# Altium PCB ESPModulv2.PcbDoc
Units mil, origin at the board's own origin, x right, y up, seen from the top; angles counter-clockwise.
Board outline 2955.91 x 2952.76 mil, 2 copper layers (Top Layer, Bottom Layer); 61 components, 47 nets, 242 pads, 84 vias.
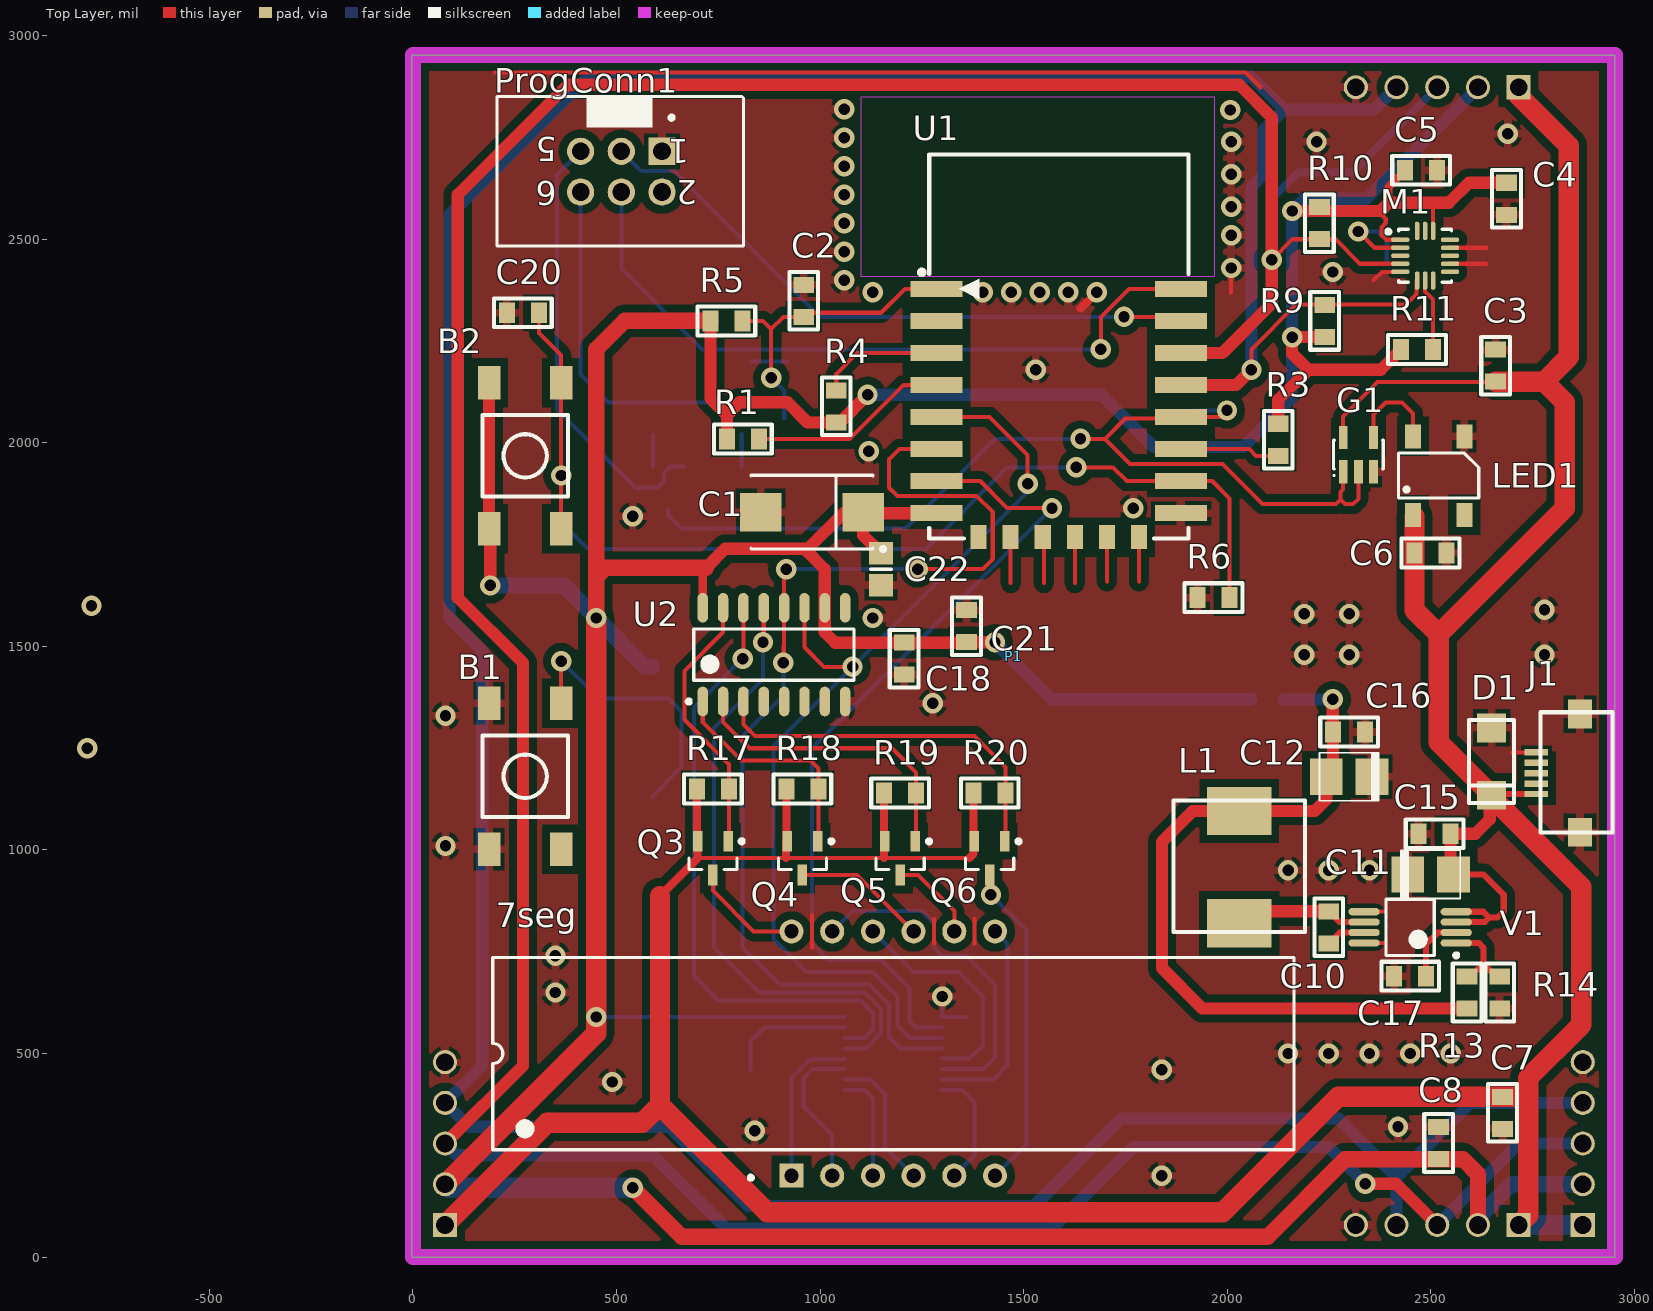
[diagram p0: Top Layer view]
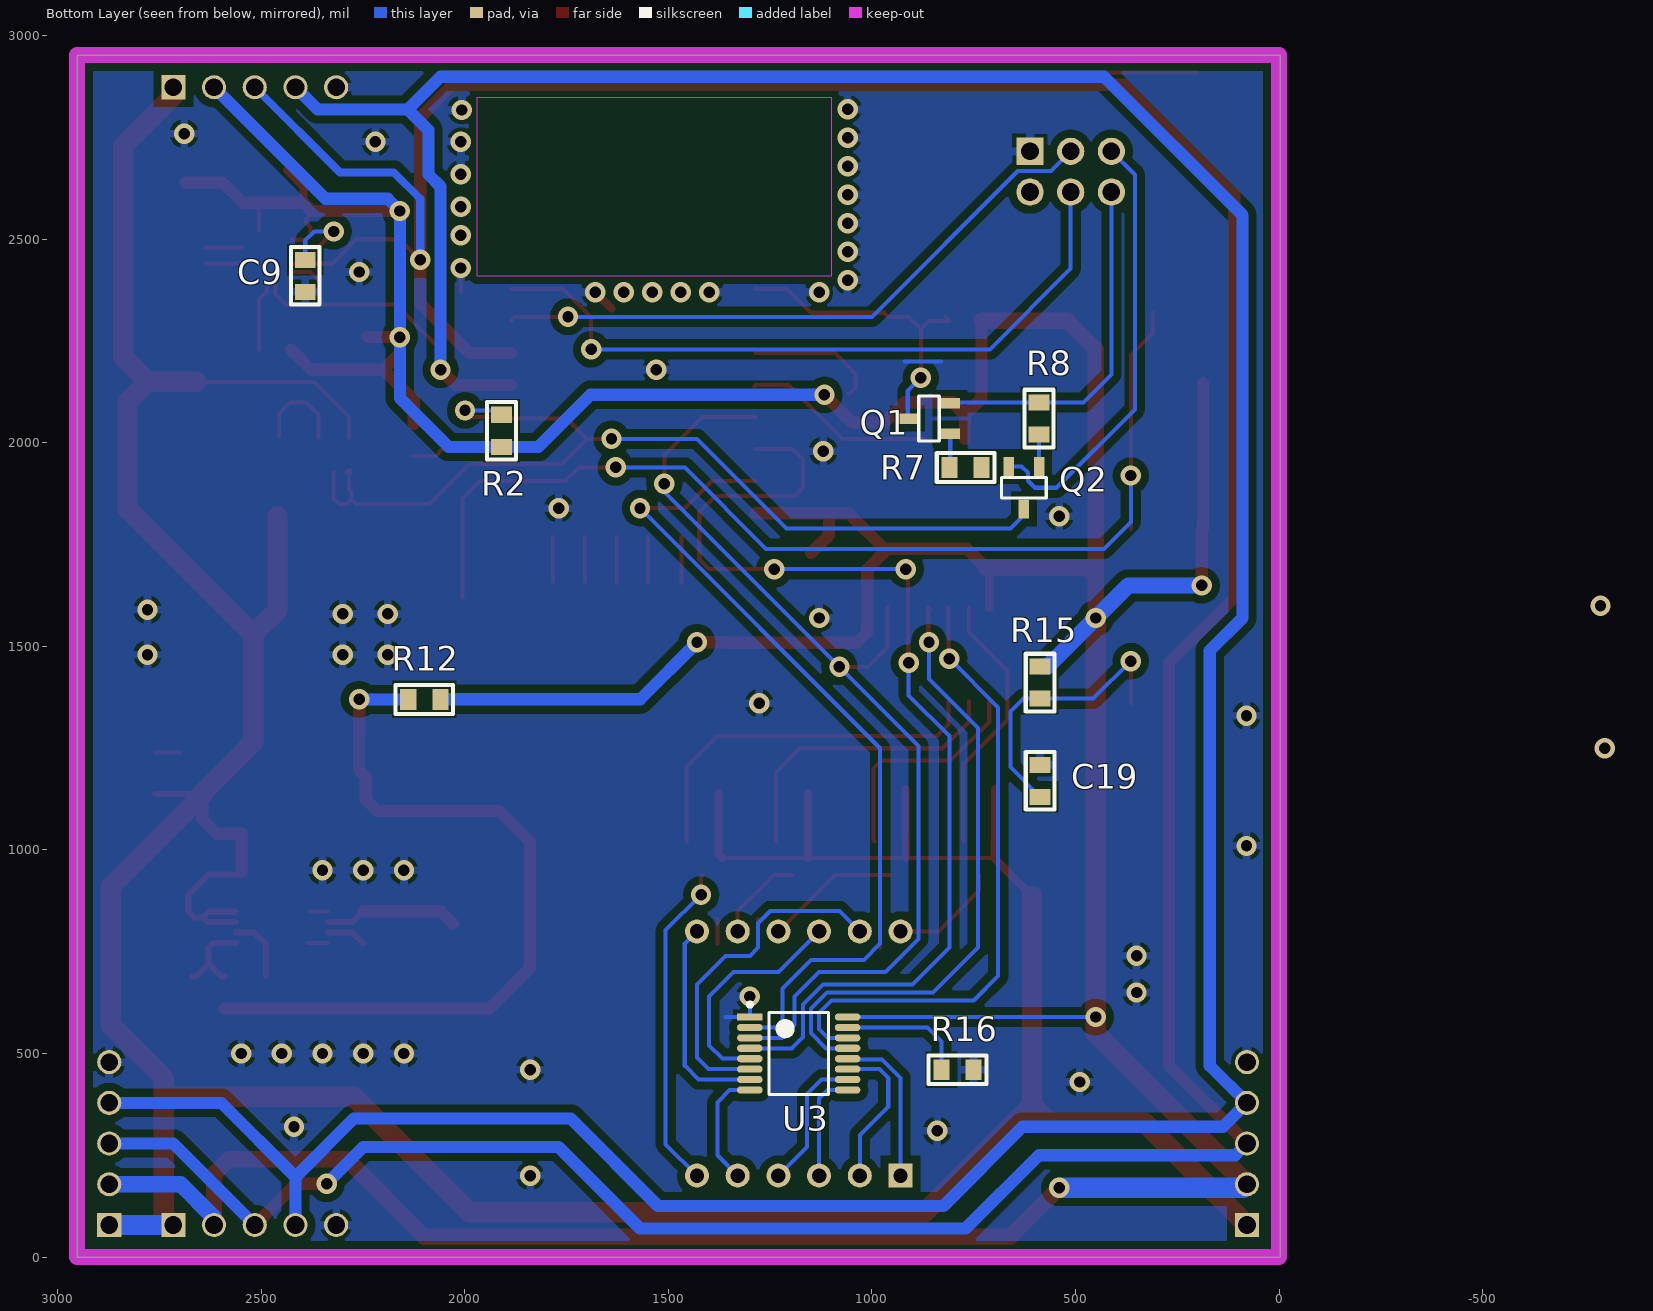
[diagram p1: Bottom Layer view, seen from below]

## Layer stack, top to bottom
Top Solder: solder mask 0.4, Solder Resist, Dk 3.5
Top Layer: signal copper 1.4
Dielectric 1: dielectric 12.6, FR-4, Dk 4.8
Bottom Layer: signal copper 1.4
Bottom Solder: solder mask 0.4, Solder Resist, Dk 3.5

## Board outline
-3.15,0 2952.76,0 2952.76,2952.76 -3.15,2952.76

## Design rules (kind name [scope] priority, off if disabled: settings)
Clearance Clearance_1 [InPoly vs not InNet('GND')] p1: gap=20
Clearance [All] p2: gap=10
PolygonConnect PolygonConnect_5 [All vs IsNamedPolygon('GND_L02_P002')] p1: connectstyle=Relief reliefconductorwidth=20 reliefentries=4 polygonreliefangle="90 Angle" airgapwidth=10
PolygonConnect PolygonConnect_4 [All vs IsNamedPolygon('GND_L01_P000')] p2: connectstyle=Relief reliefconductorwidth=20 reliefentries=4 polygonreliefangle="90 Angle" airgapwidth=10
PolygonConnect PolygonConnect_3 [All vs IsNamedPolygon('GND_L01_P000')] p3: connectstyle=Relief reliefconductorwidth=10 reliefentries=4 polygonreliefangle="45 Angle" airgapwidth=10
PolygonConnect PolygonConnect_2 [All vs IsNamedPolygon('GND_L01_P000')] p4: connectstyle=Relief reliefconductorwidth=10 reliefentries=4 polygonreliefangle="45 Angle" airgapwidth=10
PolygonConnect PolygonConnect_1 [All vs IsNamedPolygon('GND_L02_P002')] p5: connectstyle=Relief reliefconductorwidth=10 reliefentries=4 polygonreliefangle="45 Angle" airgapwidth=10
PolygonConnect [All] p6: connectstyle=Relief reliefconductorwidth=20 reliefentries=4 polygonreliefangle="90 Angle" airgapwidth=10
RoutingVias [All] p1: holewidth=28 width=50 viastyle="Through Hole" minholewidth=28 minwidth=50 maxholewidth=28 maxwidth=50
SolderMaskExpansion [All] p1: expansion=4
UnpouredPolygon [All] p1: allowunpoured=FALSE
Width [All] p1: maxlimit=50 minlimit=10 preferedwidth=10
29 further rules are at their usual default settings.

## Classes and differential pairs
component class Modul: C3 C4 C5 C6 C7 C8 C9 C10 C11 C12 C15 C16 C17 D1 G1 J1 L1 LED1 M1 ProgConn1 Q1 Q2 R7 R8 R9 R10 R11 R12 R13 R14 SideboardConn1 Sideboardconn2 V1
component class Display: 7seg *4 B1 B2 C18 C19 C20 C21 Q3 Q4 Q5 Q6 R15 R16 R17 R18 R19 R20 U2 U3
component class 02_ESP12_CORE: C1 C2 C22 R1 R2 R3 R4 R5 R6 U1

## Components (designator, comment, footprint, x,y, rotation, side; value= is the part's Value field where it differs from the comment)
7seg "4 digit, 12 pin" 7SEG-12pin 1180,500 r90 top (schematic designator 7Seg)
B1 "Button" FP_BTN_SMD 275.59,1181.1 r0 top
B2 "Button" FP_BTN_SMD 275.59,1968.5 r0 top
C1 "100uF TAJB107M006RNJ" FP_Tantal_D 980,1830 r180 top
C2 "100nF" FP_0805_CAP_085 960,2349.37 r270 top
C3 "100nF" FP_0805_CAP_085 2660,2190 r270 top
C4 "4.7uF" FP_0805_CAP_085 2686.85,2600 r90 top
C5 "100nF" FP_0805_CAP_085 2476.85,2670 r180 top
C6 "100nF" FP_0805_CAP_085 2500,1730 r180 top
C7 "10uF" FP_0805_CAP_085 2677.17,354.33 r90 top
C8 "10uF" FP_0805_CAP_085 2520,280 r270 top
C9 "100nF" FP_0805_CAP_085 2392.52,2410.63 r90 bottom
C10 "100nF" FP_0805_CAP_085 2250,810 r270 top
C11 "10uF" FP_3528 2500,940 r0 top
C12 "10uF" FP_3528 2300,1180 r180 top
C15 "1uF" FP_0805_CAP_085 2510,1040 r0 top
C16 "1uF" FP_0805_CAP_085 2300,1290 r180 top
C17 "1uF" FP_0805_CAP_085 2450,690 r0 top
C18 "100nF" FP_0805_CAP_085 1206.85,1470 r90 top
C19 "100nF" FP_0805_CAP_085 586.85,1170 r270 bottom
C20 "100nF" FP_0805_CAP_085 270,2320 r0 top
C21 "100nF" FP_0805_CAP_085 1360,1550 r270 top
C22 "1uF" 6-0805_M 1150,1690 r90 top
D1 "ZENER" FP_SMA 2650,1300 r270 top
G1 "SingleGate" SOT23-5 2322.83,1971.46 r0 top
J1 "USB Micro Type B" usb_micro 2760,1240 r270 top
L1 "15uH" FP_IND_MURATA3131 2030,820 r0 top
LED1 "WS2812B" PLCC4-LED 2520,1920 r90 top
M1 "MMA8452" QFN50P300X300X100-16N 2486.85,2460 r0 top
P1 "Connector" Csatlakozok 0,0 r0 top
ProgConn1 "Connector" HEADER6b 611.81,2716.54 r180 top
Q1 "BC817" FP_SOT23-3 860,2060 r180 bottom
Q2 "BC817" FP_SOT23-3 626.85,1890 r90 bottom
Q3 "BSS84" SOT23_N 736.85,980 r270 top
Q4 "BSS84" SOT23_N 956.85,980 r270 top
Q5 "BSS84" SOT23_N 1196.85,980 r270 top
Q6 "BSS84" SOT23_N 1416.85,980 r270 top
R1 "12K" FP_0805_RES 810.63,2010 r0 top
R2 "12K" FP_0805_RES 1910,2030 r90 bottom
R3 "12K" FP_0805_RES 2125.98,2007.87 r270 top
R4 "12K" FP_0805_RES 1040,2090 r90 top
R5 "12K" FP_0805_RES 770,2300 r0 top
R6 "12K" FP_0805_RES 1966.85,1620 r0 top
R7 "12K" FP_0805_RES 770,1940 r180 bottom
R8 "12K" FP_0805_RES 590,2060 r90 bottom
R9 "4K7" FP_0805_RES 2240,2300 r270 top
R10 "4K7" FP_0805_RES 2226.85,2540 r90 top
R11 "4K7" FP_0805_RES 2466.85,2230 r180 top
R12 "0R" FP_0805_RES 2100,1370 r180 bottom
R13 "31.6K" FP_0805_RES 2590,650 r270 top
R14 "10K" FP_0805_RES 2670,650 r90 top
R15 "100K" FP_0805_RES 586.85,1411.26 r90 bottom
R16 "1K" FP_0805_RES 790,460 r0 bottom
R17 "47K" FP_0805_RES 736.85,1150 r180 top
R18 "47K" FP_0805_RES 956.85,1150 r180 top
R19 "47K" FP_0805_RES 1196.85,1140 r180 top
R20 "47K" FP_0805_RES 1416.85,1140 r180 top
U1 "ESP_12_E" "ESP_12_E _widepad" 1271.69,2378.74 r0 top
U2 "74HCT595D" SOP127P600X175-16M 886.85,1480 r90 top
U3 "STP08DP05TTR" TSOP65P640X120-16M 1180,500 r180 bottom
V1 "MCP16311" MSOP8_TSOP65P640X120-8M 2450,810 r180 top

## Footprints (in the part's own frame and the unit in brackets; to place one, negate y for a bottom-side part, rotate by r counter-clockwise, add the part's x,y. Pads: shape width x height; smd on the part's side, far side on the other; paste and mask are expansions set on the pad)
6-0805_M [mm] "Chip Resistor, Body 2.0x1.2mm, IPC Low Density"
  rect 1.4x1.5 smd: 1(-1,0) 2(1,0)
  silkscreen extent 0,-0.65 0,0.65, body extent -1.07,-0.7 1.07,0.7, height 0.7
7SEG-12pin [mm]
  rect 1.5x1.5 hole 0.9: 1(-7.62,6.35)
  round 1.5 hole 0.9: 2(-7.62,3.81) 3(-7.62,1.27) 4(-7.62,-1.27) 5(-7.62,-3.81) 6(-7.62,-6.35) 7(7.62,-6.35) 8(7.62,-3.81) 9(7.62,-1.27) 10(7.62,1.27) 11(7.62,3.81) 12(7.62,6.35)
  Mechanical 13 keep-out lines w0.1: -9.5,25 -9.5,-25
  silkscreen extent -7.87,-25 6,25
Csatlakozok [mm] "Minden csatlakozó"
  rect 1.5x1.5 hole 1.1: 1(2,2) 1(69,2) 1(69,73) 1(73,2)
  round 1.5 hole 1.1: 2(2,4.54) 2(66.46,2) 2(66.46,73) 2(73,4.54) 3(2,7.08) 3(63.92,2) 3(63.92,73) 3(73,7.08) 4(2,9.62) 4(61.38,2) 4(61.38,73) 4(73,9.62) 5(2,12.16) 5(58.84,2) 5(58.84,73) 5(73,12.16)
  body extent -11.31,-11.7 86.48,86.48, height 5.8
"ESP_12_E _widepad" [mm] "ESP-12 Wi-Fi Module by AI-Thinker"
  rect 3.25x1 smd: 1(0.375,0) 2(0.375,-2) 3(0.375,-4) 4(0.375,-6) 5(0.375,-8) 6(0.375,-10) 7(0.375,-12) 8(0.375,-14) 15(15.625,-14) 16(15.625,-12) 17(15.625,-10) 18(15.625,-8) 19(15.625,-6) 20(15.625,-4) 21(15.625,-2) 22(15.625,0)
  rect 1x1.5 smd: 9(3,-15.5) 10(5,-15.5) 11(7,-15.5) 12(9,-15.5) 13(11,-15.5) 14(13,-15.5)
  silkscreen extent -0.7,-15.57 16.08,8.37, body extent 0,-15.49 16,8.51, height 2.75
FP_0805_CAP_085 [mm] "0805 kapacitás YAGEO 0.85mm magas"
  rect 1x1.3 smd: 1(-1,0) 2(1,0)
  silkscreen extent -1.8,-0.9 1.8,0.9, body extent -1,-0.64 1.03,0.64, height 0.85
FP_0805_RES [mm] "0805 ellenállás"
  rect 1x1.3 smd: 1(-1,0) 2(1,0)
  silkscreen extent -1.8,-0.9 1.8,0.9, body extent -1,-0.62 1,0.63, height 0.62
FP_3528 [mm] "3528 TANTÁL SMD \"B\"-TOK"
  rect 2.05x2.25 smd: N(-1.425,0) P(1.425,0)
  silkscreen extent -1.85,-1.5 1.85,1.5, body extent -2.52,-1.5 2.48,1.5, height 2.11
FP_BTN_SMD [mm] "SMD Push Button 6x6mm"
  rect 1.4x2.1 smd: 1(2.25,4.55) 2(2.25,-4.55) 3(-2.25,4.55) 4(-2.25,-4.55)
  silkscreen extent -2.67,-2.54 2.67,2.54, body extent -3,-5 3,5, height 5.1
FP_IND_MURATA3131 [mm] "Murata Chip Inductor LQH88P Series (3131 Size)"
  rect 4x3 smd: 1(0,0) 2(0,7)
  silkscreen extent -4.1,-0.55 4.1,7.65, body extent -4,-0.55 4,7.65, height 3.8
FP_SMA [mm] "SMA DO-214AC tok"
  rect 1.8x1.8 smd: 1(0,0) 2(4.2,0)
  silkscreen extent -0.5,-1.4 4.7,1.4, body extent -0.5,-1.3 4.7,1.3, height 2.42
FP_SOT23-3 [mm] "SOT23-3 tok"
  rect 1.2x0.65 smd: 1(1.327,-0.95) 2(1.327,0.95) 3(-1.327,0)
  silkscreen extent -0.64,-1.4 0.64,1.4, body extent -1.27,-1.46 1.27,1.46, height 0.97
FP_Tantal_D [mm] "Capacitor, SM Tantalum; Body 7.3 x 4.3 mm (LxW typ)"
  rect 2.6x2.4 smd: 1(-3.2,0) 2(3.2,0)
  silkscreen extent -4.58,-2.3 3.8,2.42
HEADER6b [mm] "Connector; IDC, Straight Press-in Pin, Thru-Hole; 10 Position; Vertical; Pitch 2.54 mm; Body 20.32 x 9.2 x 9.45 mm (LxWxH)"
  rect 1.7x1.7 hole 1.1: 1(0,0)
  round 1.7 hole 1.1: 2(0,2.54) 3(2.54,0) 4(2.54,2.54) 5(5.08,0) 6(5.08,2.54)
  silkscreen extent -5.08,-3.43 10.3,5.9
MSOP8_TSOP65P640X120-8M [mm] "TSOP, 8-Leads, Body 3,25x3,20mm, Pitch 0,65mm, IPC Low Density"
  oval 1.95x0.45 smd: 1(-2.875,0.975) 2(-2.875,0.325) 3(-2.875,-0.325) 4(-2.875,-0.975) 5(2.875,-0.975) 6(2.875,-0.325) 7(2.875,0.325) 8(2.875,0.975)
  silkscreen extent -3,-1.75 1.5,1.87
PLCC4-LED [mm] "For WS2812B"
  rect 1.5x1 smd: 1(-2.45,1.6) 2(-2.45,-1.6) 3(2.45,-1.6) 4(2.45,1.6)
  silkscreen extent -1.4,-2.5 1.4,2.5, body extent -2.5,-2.5 2.5,2.5, height 1.61
QFN50P300X300X100-16N [mm] "QFN, 16-Leads, Body 3,00x3,00mm, Pitch 0,50mm, IPC Medium Density"
  oval 1.15x0.3 smd: 1(-1.55,1) 2(-1.55,0.5) 3(-1.55,0) 4(-1.55,-0.5) 5(-1.55,-1) 9(1.55,-1) 10(1.55,-0.5) 11(1.55,0) 12(1.55,0.5) 13(1.55,1)
  oval 0.3x1.15 smd: 6(-0.5,-1.55) 7(0,-1.55) 8(0.5,-1.55) 14(0.5,1.55) 15(0,1.55) 16(-0.5,1.55)
  silkscreen extent -2.42,-1.65 1.65,1.65, body extent -1.5,-1.5 1.5,1.5, height 1
SOP127P600X175-16M [mm] "SOP, 16-Leads, Body 9,90x3,90mm, Pitch 1,27mm, IPC Low Density"
  oval 1.85x0.65 smd: 1(-2.925,4.445) 2(-2.925,3.175) 3(-2.925,1.905) 4(-2.925,0.635) 5(-2.925,-0.635) 6(-2.925,-1.905) 7(-2.925,-3.175) 8(-2.925,-4.445) 9(2.925,-4.445) 10(2.925,-3.175) 11(2.925,-1.905) 12(2.925,-0.635) 13(2.925,0.635) 14(2.925,1.905) 15(2.925,3.175) 16(2.925,4.445)
  silkscreen extent -3.05,-5 1.6,5.44, body extent -3,-5 3,5, height 1.75
SOT23-5 [mm] "SOT-23/SC-74A; 5 Leads; Body 3 x 3 mm, inc. leads (LxW max)"
  rect 0.55x1.45 smd: 1(-0.95,-1.075) 2(0,-1.075) 3(0.95,-1.075) 4(0.95,1.075) 5(-0.95,1.075)
  silkscreen extent -1.57,-1.35 1.55,0.9
SOT23_N [mm] "SOT23, 3-Leads, Body 2.9x1.3mm, Pitch 0.95mm, Lead Span 2.3mm, IPC Medium Density"
  rect 1.3x0.6 smd: 1(-1.05,0.95) 2(-1.05,-0.95) 3(1.05,0)
  silkscreen extent -1.17,-1.5 0.7,1.93, body extent -0.7,-1.5 0.7,1.5, height 1.1
TSOP65P640X120-16M [mm] "TSOP, 16-Leads, Body 5,00x4,40mm, Pitch 0,65mm, IPC Low Density"
  rect 1.6x0.45 smd: 1(-3.05,2.275)
  oval 1.6x0.45 smd: 2(-3.05,1.625) 3(-3.05,0.975) 4(-3.05,0.325) 5(-3.05,-0.325) 6(-3.05,-0.975) 7(-3.05,-1.625) 8(-3.05,-2.275) 9(3.05,-2.275) 10(3.05,-1.625) 11(3.05,-0.975) 12(3.05,-0.325) 13(3.05,0.325) 14(3.05,0.975) 15(3.05,1.625) 16(3.05,2.275)
  silkscreen extent -3.18,-2.55 1.85,3.17, body extent -2.25,-2.55 2.25,2.55, height 1.2
usb_micro [mm]
  rect 0.4x1.45 smd: 1(2.6,0) 2(1.95,0) 3(1.3,0) 4(0.65,0) 5(0,0)
  rect 1.8x1.5 smd: 6(4.985,2.725) 7(-2.385,2.725)
  silkscreen extent -2.5,0.25 5,4.75

## Part data
7seg: library part 7SEG_4Digit_12pin
B1 B2: "Push button"
C1: library part SMT_C_Tantalum_B, "Capacitor, SM Tantalum; Body 3.5 x 2.8 mm (LxW typ)"
C2 C3 C5 C6 C9 C10 C18 C19 C20 C21: library part "CAP 100nF", "Capacitor"
C4: library part "CAP 47uF", "Capacitor"
C7 C8: library part "CAP 10uF", "Capacitor"
C11 C12: library part CAP_ELECT, "Polarized Capacitor"
C15 C16 C17 C22: library part "CAP 1uF", "Capacitor"
D1: "Zener Diode"
J1: library part USB_Micro_TypeB, "Connector SMD USB Micro Type B middle mount"
L1: library part IND, "Inductor"
LED1: "WorldSemi WS2812B Smart RGB LED"
P1: library part Csatlakozók, "A modul szélsõ csatlakozói (I2C,táp,programozó,UART)"
ProgConn1: library part Connector_6pin, "6pin connector"
Q1 Q2: "NPN Transistor"
Q3 Q4 Q5 Q6: "P-channel Enhancement Mode Vertical D-MOSFET"
R1 R2 R3 R4 R5 R6 R7 R8: library part "RES 12K", "Resistor"
R9 R10 R11: library part "RES 4K7", "Resistor"
R12: library part RES, "Resistor"
R13: library part "RES 27K", "Resistor"
R14: library part "RES 10K", "Resistor"
R15: library part "RES 100K", "Resistor"
R16: library part "RES 1K", "Resistor"
R17 R18 R19 R20: library part "RES 47K", "Resistor"
U1: "ESP-12 Wi-Fi Module by AI-Thinker"
U3: "Low voltage, low current power 8-bit shift register"

## Via types
v1: diameter 50, hole 28, Top Layer to Bottom Layer, 84 vias

## Nets (pads, with @x,y where several pads share a name; then routed paths per layer and width w, separated by ;. In a path a pad name is that pad's centre, name@x,y a point inside that pad or via, vN(x,y) a via of type N, cw(c..) or ccw(c..) an arc to the next point about the centre after c; other vN are vias at no path point)
7Seg_a: 7seg.11 U3.6 | length 852.1
  Bottom Layer w10: 7seg.11 1080,850 1250,850 1280,820 1280,760 1300,740 1360,740 1430,670 1430,490 1401.61,461.61 U3.6
7Seg_b: 7seg.7 U3.7 | length 516.4
  Bottom Layer w10: U3.7 1426.02,436.02 1460,470 1460,770 7seg.7
7Seg_c: 7seg.4 U3.10 | length 344
  Bottom Layer w10: U3.10 1123.98,436.02 1160,400 1160,270 7seg.4
7Seg_d: 7seg.2 U3.11 | length 377.9
  Bottom Layer w10: 7seg.2 1030,300 960,370 960,440 981.61,461.61 U3.11
7Seg_digit1: Q3.1 R17.1 U2.15 | length 659.3
  Top Layer w10: U2.15 761.85,1535 666.85,1440 666.85,1320 776.22,1210.63 R17.1 776.22,1023.31 Q3.1
7Seg_digit2: Q4.1 R18.1 U2.1 | length 561.7
  Top Layer w10: U2.1 711.85,1315 806.85,1220 976.85,1220 996.22,1200.63 R18.1 996.22,1023.31 Q4.1
7Seg_digit3: Q5.1 R19.1 U2.2 | length 745.8
  Top Layer w10: U2.2 761.85,1315 826.85,1250 1176.85,1250 1236.22,1190.63 R19.1 1236.22,1023.31 Q5.1
7Seg_digit4: Q6.1 R20.1 U2.3 | length 927.6
  Top Layer w10: U2.3 811.85,1308.15 840,1280 1380,1280 1456.22,1203.78 R20.1 1456.22,1023.31 Q6.1
7Seg_DP: 7seg.3 U3.9 | length 268.5
  Bottom Layer w10: U3.9 1109.57,410.43 1130,390 7seg.3
7Seg_e: 7seg.1 U3.12 | length 389.5
  Bottom Layer w10: 7seg.1 930,440 975.47,485.47 1058.19,485.47 U3.12
7Seg_f: 7seg.10 U3.5 | length 569.8
  Bottom Layer w10: 7seg.10 1230,700 1340,700 1400,640 1400,520 1367.2,487.2 U3.5
7Seg_g: 7seg.5 U3.8 | length 293.2
  Bottom Layer w10: U3.8 1300.51,410 1350,410 1380,380 1380,250 7seg.5
DTR: ProgConn1.5 Q2.2 R7.2 | length 1080.8
  Bottom Layer w10: ProgConn1.5 354.33,2659.06 354.33,2082.52 546.85,1890 600,1890 617.24,1907.24 617.24,1927.24 632.24,1942.24 Q2.2
EN: R4.2 U1.3 | length 324.7
  Top Layer w10: R4.2@1056.85,2120 1040,2136.85 1040,2170 1091.26,2221.26 U1.3
GND: B1.3 B1.4 C1.2 C2.1 C3.1 C4.1 C5.1 C6.1 C7.1 C8.1 C9.1 C11.N C12.N C15.1 C16.1 C17.1 C18.1 C19.1 C20.1 C21.1 C22.1 D1.1 G1.3 J1.5 J1.6 J1.7 LED1.3 M1.5 M1.10 M1.12 P1.5 ProgConn1.1 R6.1 R14.1 R16.1 U1.15 U2.8 U3.1 V1.5 V1.8 | length 2816.9
  Top Layer w10: 201.72,2910 2046.05,2910 2082.03,2874.02 ; 980,760 980,840 ; 1280,770 1280,830 ; 1380,770 1380,830 ; 2010,2370 v1(2010,2430) ; V1.8 2385.57,771.61 ; V1.5 2381.61,848.39 ; 2360,2400 2380.63,2420.63 M1.5 ; M1.10 2635.91,2440.31 ; M1.12 2637.17,2479.68 ; 2700,1240 J1.5
  Top Layer w20: 1640,2330 v1(1680,2370)
  Bottom Layer w10: 830,2200 920,2200 ; v1@1300.08,639.92 U3.1 1359.57,589.57
  other v1: 1840,200 840,310 2420,320 490,430 1840,460 2150,500 2250,500 2350,500 2450,500 2550,500 1300,640 350,650 350,740 2150,950 2250,950 2350,950 80,1010 80,1330 1276.85,1360.63 2190,1480 2300,1480 2780,1480 1130,1570 2190,1580 2300,1580 2780,1590 540,1820 1770,1840 1120,1980 1530,2180 1130,2370 1400,2370 1470,2370 1540,2370 1610,2370 1060,2400 2260,2420 1060,2470 2010,2510 1060,2540 2010,2580 1060,2610 2010,2660 1060,2680 2010,2740 2220,2740 1060,2750 2690,2760 2008.18,2818.18 1060,2820
GPIO0: G1.1 G1.2 Q2.3 R2.2 U1.18 | length 2456.1
  Top Layer w10: v1(1640,2010) 1700,2010 ; v1@2000,2078.74 1985.04,2063.78 U1.18 1883.07,2060 1750,2060 1700,2010 ; G1.1 2285.43,1885.43 2279.02,1879.02 2279.02,1860.98 ; G1.2 2322.83,1862.83 2310,1850 2290,1850 2279.02,1860.98 ; 1700,2010 1761.5,1948.5 1988.5,1948.5 2087.01,1850 2268.03,1850 2279.02,1860.98
  Bottom Layer w10: Q2.3 626.85,1823.15 660,1790 1210,1790 1430,2010 v1(1640,2010) ; R2.2 1920.63,2080 v1(2000,2080)
GPIO2: R3.2 U1.17 | length 246
  Top Layer w10: U1.17 2054.96,1985.04 2071.5,1968.5 R3.2
GPIO02: B1.1 C19.2 R15.1 | length 690.9
  Top Layer w10: B1.1 v1(364.17,1464.17)
  Bottom Layer w10: v1(364.17,1464.17) 456.46,1371.89 R15.1 628.11,1371.89 660,1340 660,1203.78 C19.2
GPIO12: U1.6 U2.12 U3.4 | length 2753.4
  Top Layer w10: v1(910,1460) 910,1500 ; v1@911.85,1461.85 U2.12 v1@911.85,1685 ; v1(1240,1690) 1400,1690 1424.49,1714.49 1424.49,1830 1384.49,1870 1190,1870 1170,1890 1170,1960 1195.04,1985.04 U1.6
  Bottom Layer w10: v1(910,1460) 910,1380 810,1280 810,760 900,670 1120,670 1170,620 1170,540 1197.2,512.8 U3.4 ; v1(916.85,1690) v1(1240,1690)
GPIO15: B2.1 B2.2 C20.2 R6.2 U1.16 | length 2695
  Top Layer w10: C20.2 309.37,2270.63 364.17,2215.83 B2.1 B2.2 ; v1(1630,1940) 1720,1940 1753.7,1906.3 U1.16 1963.7,1906.3 2006.22,1863.78 R6.2
  Bottom Layer w10: v1(364.17,1920) 364.17,1805.83 430,1740 1260,1740 1460,1940 v1(1630,1940)
GPIO16: R1.2 U1.4 U2.13 U3.13 | length 2006.7
  Top Layer w10: U2.13@857.57,1590.88 U2.13 v1@861.85,1506.7 ; 870,2010 1072.9,2010 1204.83,2141.94 1216.27,2141.94 1216.85,2142.52 U1.4 U1.4@1288.98,2140
  Bottom Layer w10: v1(860,1510) 860,1500 860,1420 740,1300 740,760 850,650 1110,650 1150,610 1150,550 1112.8,512.8 U3.13
I2C_SCL: M1.4 P1.3 R10.1 U1.20 | length 9511.1
  Top Layer w10: v1(2110,2450) 2160.63,2500.63 R10.1 2266.22,2500.63 2326.54,2440.31 M1.4
  Top Layer w30: P1.3@78.74,278.74 270,470 270,1460 110,1620 110,2610 380,2880 2030,2880 2110,2800 v1(2110,2450) 2110,2342.52 1988.74,2221.26 U1.20 ; v1(2340,180) 2415.28,180 P1.3@2516.54,78.74
  Bottom Layer w20: v1(2110,2450) 2110,2600 2175,2665 2307.52,2665 P1.3@2516.54,2874.02
  Bottom Layer w30: P1.3@78.74,278.74 107.48,250 590,250 770,70 1570,70 1770,270 2250,270 v1(2340,180) ; P1.3@2516.54,78.74 2716.54,278.74 P1.3@2874.02,278.74
I2C_SDA: M1.6 P1.4 R9.1 U1.19 | length 9423.3
  Top Layer w10: v1(2060,2180) 2060,2230 2170,2340 2440,2340 2465.94,2365.94 M1.6@2465.94,2398.98
  Top Layer w30: U1.19 2022.52,2142.52 v1(2060,2180)
  Bottom Layer w30: v1(2060,2180) 2060,2630 2090,2660 2090,2768.98 2140.51,2819.49 2362.01,2819.49 P1.4@2416.54,2874.02 ; 2140,2820 2060,2900 430,2900 90,2560 90,1570 170,1490 170,470 78.74,378.74 137.48,320 630,320 824.53,125.47 1525.47,125.47 1740,340 2273.07,340 2416.54,196.54 ; P1.4@2416.54,78.74 2416.54,196.54 ; P1.4@2874.02,378.74 2598.74,378.74 2416.54,196.54
Net7seg_6: 7seg.6 Q6.3 | length 814.6
  Top Layer w10: Q6.3 1420,935.51 v1(1420,890)
  Bottom Layer w10: v1@1420,883.15 v1(1420,890) 1506.85,803.15 1506.85,276.85 7seg.6
Net7seg_8: 7seg.8 Q5.3 | length 219.9
  Top Layer w10: Q5.3 1241.34,938.66 1330,850 7seg.8
Net7seg_9: 7seg.9 Q4.3 | length 330.6
  Top Layer w10: Q4.3 1091.34,938.66 7seg.9
Net7seg_12: 7seg.12 Q3.3 | length 273.2
  Top Layer w10: Q3.3 736.85,900 836.85,800 7seg.12
NetC9_2: C9.2 M1.2 | length 245.9
  Top Layer w10: v1(2322.83,2519.68) 2362.83,2479.68 M1.2
  Bottom Layer w10: v1(2322.83,2519.68) 2370.31,2519.68 2392.52,2497.48 C9.2
NetC10_1: C10.1 L1.1 V1.6 | length 330
  Top Layer w15: C10.1 2276.57,822.8 V1.6
  Top Layer w30: L1.1 2059.37,849.37 C10.1
NetC10_2: C10.2 V1.7 | length 97.8
  Top Layer w15: C10.2 2276.57,797.2 V1.7
NetC12_P: C12.P C16.2 L1.2 R12.1 R13.2 | length 1922
  Top Layer w30: v1(2260,1370) 2260,1290.63 C16.2 2260.63,1196.73 C12.P 2243.9,1123.9 2215.59,1095.59 L1.2 1915.59,1095.59 1840,1020 1840,710 1939.37,610.63 R13.2
  Bottom Layer w30: R12.1 v1(2260,1370)
NetC17_2: C17.2 V1.2 | length 164.7
  Top Layer w15: C17.2 2489.37,769.37 2517.2,797.2 V1.2
NetG1_4: G1.4 LED1.4 | length 232.1
  Top Layer w10: G1.4 2360.24,2069.76 2390,2099.53 2429.53,2099.53 2457.01,2072.04 LED1.4
NetQ1_2: Q1.1 R7.1 | length 81
  Bottom Layer w10: R7.1@807.76,1941.61 Q1.1
NetQ2_2: Q2.1 R8.1 | length 77.8
  Bottom Layer w10: Q2.1 R8.1@589.45,2020.08
NetR13_1: R13.1 R14.2 V1.1 | length 217
  Top Layer w15: V1.1 2618.39,771.61 2630,760 2630,720 ; R13.1 2599.37,689.37 2630,720 ; R14.2 2660.63,689.37 2630,720
NetR16_2: R16.2 U3.15 | length 314.3
  Bottom Layer w10: R16.2 829.37,529.37 863.98,563.98 U3.15
NetU2_14: U2.14 U3.14 | length 1551.2
  Top Layer w10: v1@811.85,1470 U2.14
  Bottom Layer w10: v1(810,1470) 690,1350 690,690 750,630 1100,630 1130,600 1130,560 1108.39,538.39 U3.14
nRST: C2.2 Q1.3 R5.2 U1.1 | length 782.8
  Top Layer w10: R5.2@819.37,2310 R5.2 860,2300 880,2280 ; v1(880,2160) 880,2280 ; 880,2280 910,2310 C2.2 970,2320 1150,2320 1208.74,2378.74 U1.1@1283.94,2378.74 ; U1.1@1283.94,2378.74 U1.1 1285.2,2380 U1.1@1283.94,2378.74
  Bottom Layer w10: v1@880,2165.51 v1(880,2160) 912.24,2127.76 Q1.3
RTS: ProgConn1.6 Q1.2 R8.2 | length 870.8
  Bottom Layer w10: ProgConn1.6 411.81,2168.19 480.63,2099.37 R8.2 Q1.2@805.79,2099.37
RXD0: ProgConn1.3 U1.21 | length 1547.6
  Top Layer w10: v1(1746.85,2310) 1876.85,2310 U1.21
  Bottom Layer w10: ProgConn1.3 560.28,2668.07 641.93,2668.07 1000,2310 v1(1746.85,2310)
SA0: M1.7 R11.1 | length 177
  Top Layer w10: M1.7 2486.85,2372.36 2506.22,2352.99 R11.1
SPI_CLK: U1.5 U2.11 U3.3 | length 2501
  Top Layer w10: U2.11 961.85,1498.15 1010,1450 v1(1080,1450) ; U1.5 1416.22,2063.78 1510,1970 v1(1510,1900)
  Bottom Layer w10: U3.3 1221.61,538.39 1190,570 1190,640 1130,700 967.03,700 885.47,781.56 885.47,1255.47 v1(1080,1450) 1510,1880 v1(1510,1900)
SPI_MOSI: U1.7 U3.2 | length 2077.7
  Top Layer w10: U1.7 1393.7,1906.3 1460,1840 v1(1570,1840)
  Bottom Layer w10: U3.2 1236.02,563.98 1220,580 1220,660 1150,730 1020,730 980,770 980,1250 v1(1570,1840)
TXD0: ProgConn1.4 U1.22 | length 1759.9
  Top Layer w10: v1(1690,2230) 1690,2310 1758.74,2378.74 U1.22
  Bottom Layer w10: ProgConn1.4 511.81,2428.19 710,2230 1676.3,2230 1683.15,2223.15 v1@1693.15,2223.15
U5V: C3.2 C6.2 C7.2 C11.P C15.2 D1.2 G1.5 J1.1 LED1.1 P1.1 Q3.2 Q4.2 Q5.2 Q6.2 R17.2 R18.2 R19.2 R20.2 V1.3 V1.4 | length 10046.4
  Top Layer w10: 700,980 916.85,980 1156.85,980 1366.85,980 ; G1.5 2285.43,2065.43 2370,2150 2659.37,2150 C3.2
  Top Layer w15: C11.P@2549.37,946.73 C11.P 2630,940 2680,890 2680,850 2664.19,834.19 2644.19,834.19 ; V1.3@2563.19,823.56 2633.56,823.56 2644.19,834.19 ; V1.4 2630,848.39 2644.19,834.19 ; D1.2@2652.99,1137.64 J1.1
  Top Layer w20: 606.85,886.85 699.45,979.45 Q3.2 697.48,1023.31 R17.2 ; 916.85,980 916.85,1022.68 917.48,1023.31 R18.2 ; 1156.85,980 1156.85,1022.68 1157.48,1023.31 R19.2 ; 1366.85,980 1377.48,990.63 R20.2
  Top Layer w30: C11.P@2549.37,946.73 C15.2 2610,1040 2645.35,1075.35 D1.2@2645.35,1134.65
  Top Layer w50: P1.1@78.74,78.74 330,330 563.7,330 606.85,373.15 ; 606.85,886.85 606.85,373.15 ; LED1.1@2460.63,1819.92 C6.2 2460.63,1589.37 2520,1530 ; D1.2@2645.35,1134.65 2870,910 2870,570 2740,440 2740,370 ; D1.2 2520,1264.65 2520,1530 ; C3.2 2779.37,2150.63 ; P1.1@2716.54,78.74 2740,102.2 2740,370 ; P1.1@2716.54,2874.02 2716.54,2853.46 2830,2740 ; 2840,2730 2840,2211.26 2779.37,2150.63 ; 606.85,373.15 870,110 1990,110 2273.7,393.7 C7.2 2716.3,393.7 2740,370 ; 2520,1530 2830,1840 2830,2100 2779.37,2150.63
  Bottom Layer w50: P1.1@2716.54,78.74 P1.1@2874.02,78.74
VDD3V3: B2.3 B2.4 C1.1 C4.2 C5.2 C8.2 C18.2 C21.2 C22.2 M1.1 M1.14 P1.2 R1.1 R2.1 R3.1 R4.1 R5.1 R9.2 R10.2 R11.2 R12.2 R15.2 U1.8 U2.10 U2.16 U3.16 | length 14001.8
  Top Layer w10: C21.2@1360,1509.37 C21.2 ; 2376.85,2563.15 2390,2550 2390,2540 2380,2530 2380,2510 2390.63,2499.37 M1.1 ; 2502.52,2590 2506.54,2585.99 M1.14
  Top Layer w20: B2.4 B2.4@190,1786.38 ; U2.16 711.85,1685 720,1693.15 ; 2396.85,2590 2396.85,2629.37 C5.2
  Top Layer w30: B2.4 B2.3 ; v1(190,1650) B2.4@190,1786.38 ; 720,1693.15 766.85,1740 961.85,1740 1011.85,1690 U2.10 1011.85,1535 1037.48,1509.37 C18.2 C21.2@1360,1509.37 ; R5.1 730.63,2109.37 771.26,2068.74 ; R1.1 771.26,2068.74 ; 970,1740 1057.56,1827.56 C1.1@1105.98,1827.56 ; v1(1116.85,2118.28) 1049.2,2050.63 R4.1 969.37,2050.63 920,2100 802.52,2100 771.26,2068.74 ; C22.2 1105.98,1773.39 C1.1@1105.98,1827.56 ; U1.8 C1.1@1105.98,1827.56 ; C21.2 v1@1429.37,1510.63 ; R3.1 2125.98,2105.99 2200,2180 ; v1(2160,2570) 2376.85,2570 2396.85,2590 2502.52,2590 2545.06,2590 2594.43,2639.37 C4.2 ; R9.2 2160.63,2260.63 v1(2160,2260) 2160,2220 2200,2180 ; R11.2 2377.48,2180 2200,2180
  Top Layer w40: v1(450,1570) 450,1670 ; v1(540,170) 660,50 2100,50 2290,240 2580,240 2616.54,203.46 P1.2@2616.54,78.74 ; 720,1693.15 473.15,1693.15 450,1670 ; R5.1 520,2300 450,2230 450,1670
  Top Layer w50: P1.2@78.74,178.74 450,550 v1(450,1570)
  Bottom Layer w10: P1.2@78.74,178.74 P1.2@87.48,170 ; v1(450.43,589.57) U3.16
  Bottom Layer w30: v1(1116.85,2118.28) 1691.72,2118.28 1820,1990 2040,1990 2160,2110 v1(2160,2260) v1(2160,2570) 2190,2600 2342.52,2600 P1.2@2616.54,2874.02 ; v1(1430,1510) 1569.37,1370.63 R12.2@2059.37,1370.63
  Bottom Layer w40: v1(190,1650) 370,1650 v1(450,1570) 569.37,1450.63 R15.2 ; P1.2@2616.54,78.74 2616.54,96.54 2698.74,178.74 P1.2@2874.02,178.74
  Bottom Layer w50: P1.2@87.48,170 v1(540,170)
pads on no net: B1.2 J1.2 J1.3 J1.4 LED1.2 M1.3 M1.8 M1.9 M1.11 M1.13 M1.15 M1.16 ProgConn1.2 U1.2 U1.9 U1.10 U1.11 U1.12 U1.13 U1.14 U2.4 U2.5 U2.6 U2.7 U2.9
copper on no net: | length 554.4
  Top Layer w10: 1468.54,1656.02 1468.54,1768.5 ; 1550,1656.02 1550,1768.5 ; 1626.02,1656.02 1626.02,1768.5 ; 1704.76,1660 1704.76,1768.5 ; 1783.5,1660 1783.5,1768.5
  other v1: -800,1250 -790,1600

## Polygon pours and split planes (outlines as drawn)
GND on Bottom Layer "GND_L02_P002" (solid, pour order 2): 7.38,9.99 2957.38,9.99 2957.38,2962.75 10.13,2962.75 7.38,2959.99
GND on Top Layer "GND_L01_P000" (solid, pour order 0): -9.14,-8.93 2943.62,-8.93 2943.62,2943.83 2940.86,2941.07 -9.14,2941.07

## Keep-outs
Keep-Out Layer:
  rectangle: 1100,2410 1970,2850
  lines w39.37: 0,0 2952.76,0 2952.76,2952.76 0,2952.76 0,0

## Text inside footprints (layer, text, board x,y; h text height)
ProgConn1: Top Overlay "5" at 352.76,2751.18 h59.06 r180; Top Overlay "6" at 352.76,2642.91 h59.06 r180; Top Overlay "1" at 678.73,2746.06 h59.06 r180; Top Overlay "2" at 698.41,2646.06 h59.06 r180
U1: Mechanical 13 "ANTENNA AREA" at 1276.69,2688.74 h10; Mechanical 13 "CUTOUT POLYGON" at 1276.69,2668.74 h10